# EAGLE board power-ac_rev_1 (EAGLE 6.3)
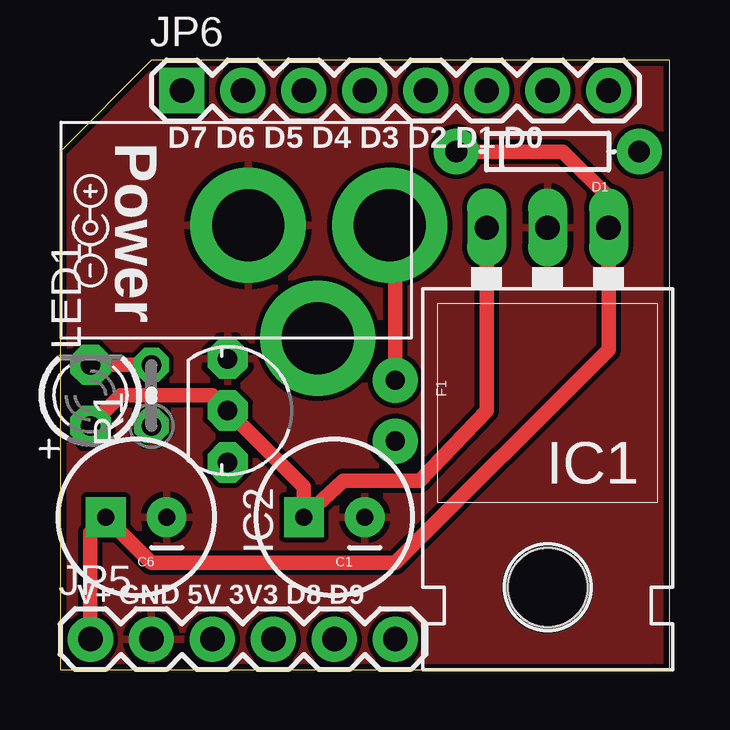
[diagram p0: board, top side]
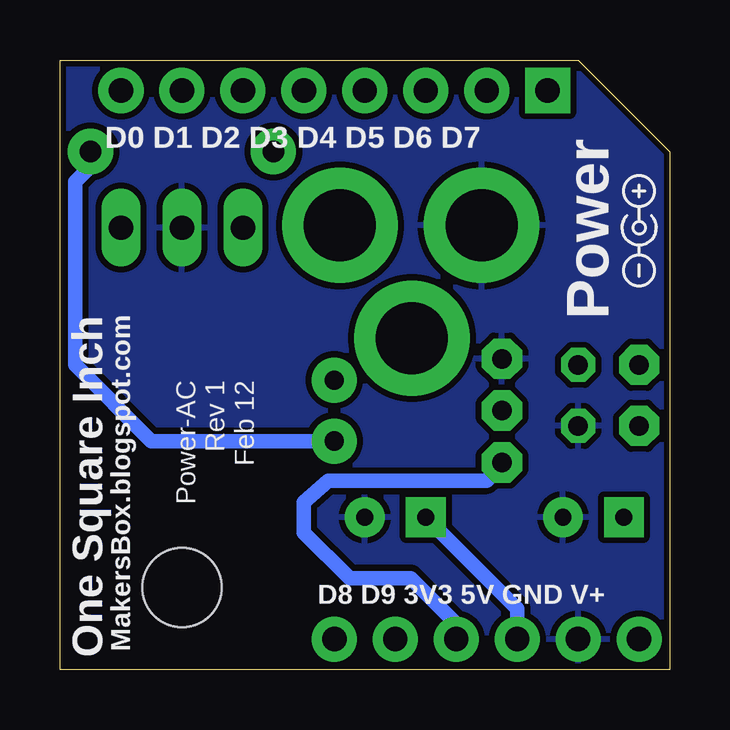
[diagram p1: board, bottom side, seen from below]

Size 25.4 x 25.4 mm. Coordinates in mm from the lower left corner, seen from the top.
Outline: 25.4,25.4 25.4,21.59 25.4,0 24.77,0 24.77,0 0,0 0,21.59
Outline: 25.4,25.4 3.81,25.4 0,21.59
Outline: 0,21.59 0,21.59
Copper layers (1*16): Top 0.035mm / dielectric 1.5mm / Bottom 0.035mm
Design rules "SparkFun": minimum track width 8mil, minimum drill 20mil, track to track 8mil, track to pad 8mil, pad to pad 8mil, via to via 8mil, smd to smd 8mil, copper to edge 10mil, drill to drill 8mil, minimum pad ring 12mil, minimum via ring 10mil, stop-mask expansion 4mil, vias tented up to drill 25mil, thermal gap 10mil

## Footprints (pad centres in the part's own frame; a part is rotated, then mirrored left to right if it is on the bottom)
CPOL-RADIAL-100UF-25V = drill 0.7 pad 1.651 square: 1 1.27,0 | drill 0.7 pad 1.651: 2 -1.27,0
DIODE-1N4148 = drill 0.9 pad 1.88: A -3.81,0; C 3.81,0
PTC = drill 0.8 pad 1.88: P$1 -1.27,0; P$2 1.27,0
TO-220-ALT = drill 1.016 long: GND 0,-3.81; IN -2.54,-3.81; OUT 2.54,-3.81 | hole 3.302: 0,11.176
TO92-INLINE = drill 0.813 pad 1.676 octagon: 1 -2.159,0; 2 0,0; 3 2.159,0
1X06 = drill 1.016 pad 1.88: 1 0,0; 2 2.54,0; 3 5.08,0; 4 7.62,0; 5 10.16,0; 6 12.7,0
1X08 = drill 1.016 pad 1.88 square: 1 0,0 | drill 1.016 pad 1.88: 2 2.54,0; 3 5.08,0; 4 7.62,0; 5 10.16,0; 6 12.7,0; 7 15.24,0; 8 17.78,0
LED3MM = drill 0.813 pad 1.676 octagon: A -1.27,0; K 1.27,0
0204V = drill 0.813 octagon: 1 -1.27,0; 2 1.27,0
PJ-102A = drill 3 pad 4.8: RING 0.1,-3.39; RING_SW -4.6,-6.29; TIP 0.1,-9.29

## Placement (x,y rotation side)
C1  [CPOL-RADIAL-100UF-25V]  11.43,6.35 180 top
C6  [CPOL-RADIAL-100UF-25V]  3.17,6.35 180 top
D1  [DIODE-1N4148]  20.32,21.59 180 top
F1  PTCPTH  [PTC]  13.97,10.79 270 top
IC1  [TO-220-ALT]  20.32,14.61 180 top
IC2  [TO92-INLINE]  6.99,10.79 270 top
JP5  [1X06]  1.27,1.27 0 top
JP6  [1X08]  5.08,24.13 0 top
LED1  [LED3MM]  1.27,11.43 90 top
R1  [0204V]  3.81,11.43 90 top
U$1  2.1MMJACKTHM  [PJ-102A]  4.45,18.41 90 top
U$2  [DC_POS_CTR]  1.27,18.41 90 top
U$3  [DC_POS_CTR-BOTTOM]  1.27,18.41 90 top

## Library data of the parts
C1 C6 D1 IC1 JP5 JP6 = SparkFun
F1 = SparkFun_mod
IC2 LED1 R1 U$1 = adafruit
U$2 U$3 = DC_SYM

## Nets
+3V3: IC2.3 JP5.4
+5V: C1.1 IC1.OUT IC2.2 JP5.3 LED1.A
AREF_D0: JP6.8
D1: JP6.7
D2: JP6.6
D3: JP6.5
D5: JP6.3
D7: JP6.1
D8: JP5.5
D9: JP5.6
GND: C1.2 C6.2 IC1.GND IC2.1 JP5.2 R1.1 U$1.RING
N$1: F1.P$1 U$1.TIP
N$2: LED1.K R1.2
N$3: D1.A F1.P$2
SCL_D4: JP6.4
SDA_D6: JP6.2
V+: C6.1 D1.C IC1.IN JP5.1

## Tracks (layer width: path | path; a pad name or v marks a point on that pad's centre or on a via)
+3V3
  Bottom 0.61: JP5.4 8.89,1.91 10.79,3.81 13.34,3.81 15.24,5.71 15.24,6.99 14.22,7.87 7.62,7.87 IC2.3
+5V
  Top 0.61: LED1.A 2.54,11.43 6.35,11.43 IC2.2 10.16,7.62 C1.1 11.81,7.87 14.99,7.87 17.78,10.79 IC1.OUT
  Bottom 0.61: JP5.3 6.35,2.54 C1.1
GND
  pour Bottom (isolate 0.254): -1.27,26.67 26.67,26.67 26.67,-1.27 -1.27,-1.27
  pour Top: -0.64,26.04 26.67,26.04 26.67,0 26.04,-0.64 -0.64,-0.64
N$1
  Top 0.61: F1.P$1 13.97,18.28 U$1.TIP
N$2
  Top 0.61: LED1.K R1.2
N$3
  Bottom 0.61: F1.P$2 21.59,9.53 24.77,12.7 24.77,20.32 24.13,20.95 D1.A
V+
  Top 0.61: JP5.1 1.27,5.71 C6.1 3.81,4.45 13.97,4.45 22.86,13.34 IC1.IN 22.86,19.68 20.95,21.59 D1.C

## Text on the board
tPlace: Power | D7 D6 D5 D4 D3 D2 D1 D0 | V+ GND 5V 3V3 D8 D9
bPlace: D0 D1 D2 D3 D4 D5 D6 D7 | Power | Power-AC / Rev 1 / Feb 12 | D8 D9 3V3 5V GND V+ | MakersBox.blogspot.com | One Square Inch